# Altium PCB MCU_Board.PcbDoc (part 2 of 2)
Units mil, origin at the board's own origin, x right, y up, seen from the top; angles counter-clockwise.
Board outline 5411.85 x 3910 mil, 4 copper layers (Top Layer, Second Layer, Third Layer, Fouth Layer), stack 59.526 mil thick; 116 components, 143 nets, 703 pads, 913 vias.
Unrouted connection lines stored in the file: 4.
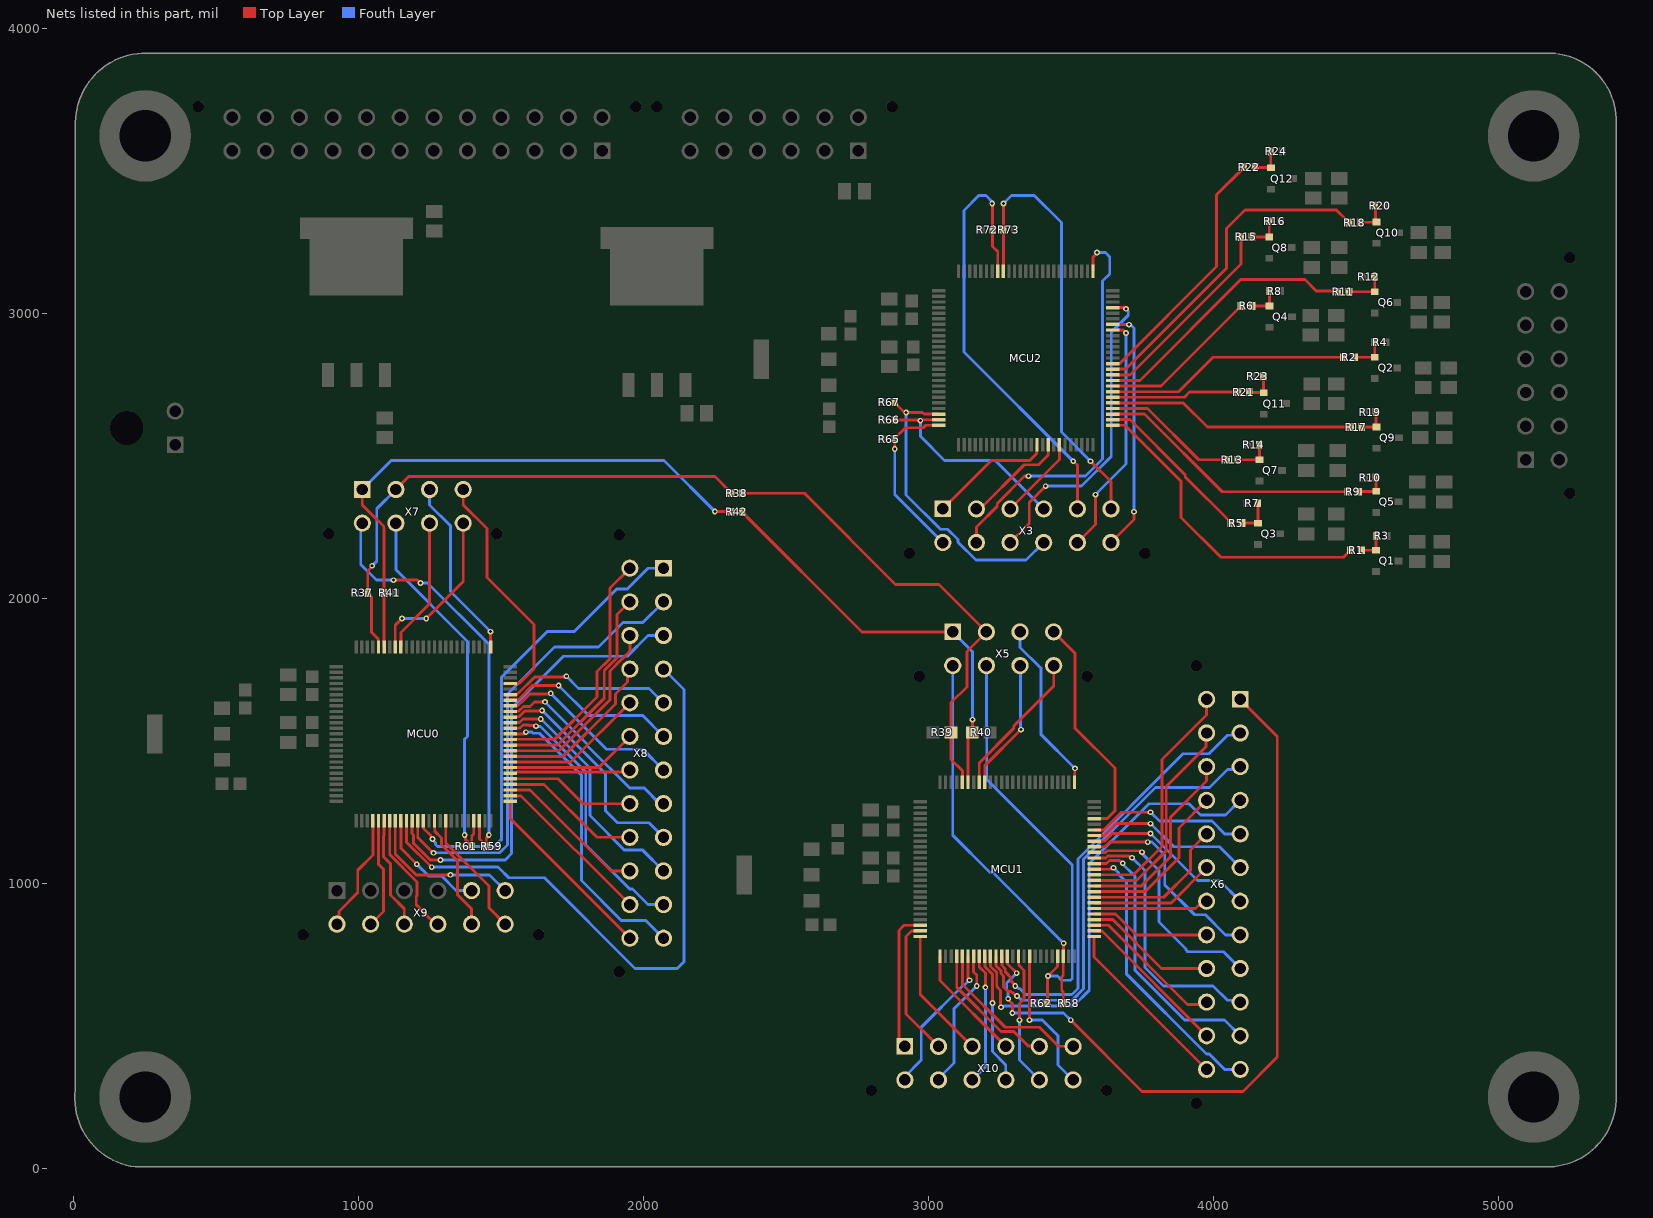
[diagram p4: the nets of this part, all layers, seen from the top]

## Via types
v1: diameter 20, hole 10, Top Layer to Fouth Layer, tented both sides, 913 vias

## Nets (pads, with @x,y where several pads share a name; then routed paths per layer and width w, separated by ;. In a path a pad name is that pad's centre, name@x,y a point inside that pad or via, vN(x,y) a via of type N, cw(c..) or ccw(c..) an arc to the next point about the centre after c; other vN are vias at no path point) (continued)
NetMCU0_29: MCU0.29 X9.P$7 | length 415.2
  Top Layer w10: X9.P$7@923.7,856.89 930.25,863.44 930.25,902.01 996.69,968.45 996.69,1046.34 1049.65,1099.3 MCU0.29@1049.65,1219.88
NetMCU0_30: MCU0.30 X9.P$8 | length 389
  Top Layer w10: X9.P$8@1041.81,856.89 1086.93,902.01 1086.93,1049.63 1069.33,1067.23 MCU0.30@1069.33,1219.88
NetMCU0_31: MCU0.31 X9.P$9 | length 394.2
  Top Layer w10: MCU0.31@1089.02,1219.88 1089.02,1168.77 1086.81,1166.57 1086.81,1093.88 1111.81,1068.88 1111.81,959.3 1159.92,911.19 X9.P$9@1159.92,856.89
NetMCU0_32: MCU0.32 X9.P$10 | length 440.6
  Top Layer w10: MCU0.32@1108.7,1219.88 1108.7,1101.9 1205.04,1005.56 1205.04,956.31 1201.81,953.08 1201.81,925 1269.92,856.89 X9.P$10@1278.04,856.89
NetMCU0_33: MCU0.33 X9.P$6 | length 555.7
  Top Layer w10: MCU0.33@1128.39,1219.88 1128.39,1103.43 1201.81,1030 1321.81,1030 v1(1322.01,1030.2)
  Fouth Layer w10: v1(1322.01,1030.2) 1322.21,1030 1459.26,1030 X9.P$6@1514.26,975
NetMCU0_34: MCU0.34 X9.P$5 | length 409.7
  Top Layer w10: MCU0.34@1148.07,1219.88 1148.07,1123.74 v1@1206.81,1065
  Fouth Layer w10: v1(1203.9,1067.38) 1246.24,1025.04 1291.81,1025.04 1341.85,975 X9.P$5@1396.15,975
NetMCU0_35: MCU0.35 X8.P$4 | length 2300
  Top Layer w10: MCU0.35@1167.76,1219.88 1167.76,1144.41 1254.9,1057.27 v1(1256.21,1057.27)
  Fouth Layer w10: v1(1256.21,1057.27) 1256.44,1057.5 1322.94,1057.5 1489.31,1057.5 1492.24,1054.57 1526.81,1020 1651.81,1020 1970.18,701.64 2118.45,701.64 2141.81,725 2141.81,1680.56 X8.P$4@2069.92,1752.45
NetMCU0_36: MCU0.36 X8.P$3 | length 1608.1
  Top Layer w10: MCU0.36@1187.44,1219.88 1187.44,1175.12 1192.13,1170.44 1192.13,1141.25 1251.11,1082.27 1286.58,1082.27 v1(1286.81,1082.5)
  Fouth Layer w10: v1(1286.81,1082.5) 1514.31,1082.5 1536.81,1105 1536.81,1615 1719.38,1797.57 1942.63,1797.57 2015.62,1870.56 X8.P$3@2069.92,1870.56
NetMCU0_37: MCU0.37 X8.P$2 | length 1619
  Top Layer w10: MCU0.37@1207.13,1219.88 1207.13,1161.61 1261.46,1107.27 v1(1262.77,1107.27)
  Fouth Layer w10: v1(1262.77,1107.27) 1276.46,1107.5 1494.31,1107.5 1521.81,1135 1521.81,1665 1686.81,1830 1841.81,1830 1927.49,1915.68 1996.93,1915.68 X8.P$2@2069.92,1988.67
NetMCU0_38: MCU0.38 X8.P$1 | length 1642.4
  Top Layer w10: MCU0.38@1226.81,1219.88 1227.72,1218.98 1227.72,1192.88 1252.71,1167.89 1252.71,1164.87 1258.83,1158.75 v1(1258.83,1156.04)
  Fouth Layer w10: v1(1258.83,1156.04) 1258.83,1153.33 1269.39,1142.78 1269.39,1137.07 1276.46,1130 1476.81,1130 1501.81,1155 1501.81,1725 1661.81,1885 1756.81,1885 1905.6,2033.79 1942.63,2033.79 2015.62,2106.78 X8.P$1@2069.92,2106.78
NetMCU0_40: MCU0.40 X9.P$11 | length 416.8
  Top Layer w10: MCU0.40@1266.18,1219.88 1267.09,1218.98 1267.09,1183.14 1290.55,1159.68 1290.55,1135.94 1347.01,1079.49 1347.01,960.33 1396.15,911.19 X9.P$11@1396.15,856.89
NetMCU0_42: MCU0.42 X9.P$12 | length 449.4
  Top Layer w10: MCU0.42@1305.55,1219.88 1305.55,1142.16 1456.81,990.9 1456.81,914.34 X9.P$12@1514.26,856.89
NetMCU0_47: MCU0.47 R61.2 X7.P$6 | length 1344.4
  Top Layer w10: v1(1371.81,1170) 1373.73,1168.09 1373.73,1155.06 R61.2@1396.81,1131.97 ; R61.2@1396.81,1130 R61.2@1396.81,1131.97 ; MCU0.47@1403.98,1219.88 1403.98,1174.06 1396.81,1166.89 R61.2@1396.81,1131.97
  Fouth Layer w10: X7.P$6@1130.58,2265 1130.58,2101.23 1381.81,1850 1381.81,1516.35 1371.81,1506.35 v1(1371.81,1170)
NetMCU0_48: MCU0.48 R59.1 X7.P$5 | length 1524.1
  Top Layer w10: v1@1122.67,2065 1205.95,2065 1215.95,2055 v1(1216.81,2055) ; MCU0.48@1423.66,1219.88 1423.66,1155.75 R59.1@1447.44,1131.97 ; R59.1@1447.44,1130 R59.1@1447.44,1131.97 ; v1(1456.81,1170) 1456.81,1168.15 1447.44,1158.78 R59.1@1447.44,1131.97
  Fouth Layer w10: X7.P$5@1012.47,2265 1006.81,2259.34 1006.81,2120 1061.81,2065 v1(1121.81,2065) ; v1(1216.81,2055) 1241.81,2055 1456.81,1840 v1(1456.81,1170)
NetMCU0_51: MCU0.51 X8.P$24 | length 655.1
  Top Layer w10: MCU0.51@1531.93,1288.78 1531.93,1227.44 X8.P$24@1951.81,807.56
NetMCU0_52: MCU0.52 X8.P$23 | length 578.4
  Top Layer w10: MCU0.52@1531.93,1308.46 1532.84,1307.56 1569.92,1307.56 X8.P$23@1951.81,925.67
NetMCU0_53: MCU0.53 X8.P$22 | length 537.7
  Top Layer w10: MCU0.53@1531.93,1328.15 1601.75,1328.15 1886.12,1043.78 X8.P$22@1951.81,1043.78
NetMCU0_54: MCU0.54 X8.P$21 | length 496.9
  Top Layer w10: MCU0.54@1531.93,1347.83 1650.96,1347.83 1836.9,1161.89 X8.P$21@1951.81,1161.89
NetMCU0_55: MCU0.55 X8.P$20 | length 456.1
  Top Layer w10: MCU0.55@1531.93,1367.52 1700.17,1367.52 1787.69,1280 X8.P$20@1951.81,1280
NetMCU0_56: MCU0.56 X8.P$19 | length 424.4
  Top Layer w10: MCU0.56@1531.93,1387.2 1549.65,1387.2 1553.43,1390.98 1944.69,1390.98 X8.P$19@1951.81,1398.11
NetMCU0_57: MCU0.57 X8.P$18 | length 465.2
  Top Layer w10: MCU0.57@1531.93,1406.89 1842.47,1406.89 X8.P$18@1951.81,1516.23
NetMCU0_58: MCU0.58 X8.P$17 | length 505.9
  Top Layer w10: MCU0.58@1531.93,1426.57 1744.05,1426.57 X8.P$17@1951.81,1634.34
NetMCU0_59: MCU0.59 X8.P$16 | length 589.2
  Top Layer w10: MCU0.59@1531.93,1446.26 1718.07,1446.26 1901.81,1630 1901.81,1665 1944.14,1707.33 1944.14,1744.78 X8.P$16@1951.81,1752.45
NetMCU0_60: MCU0.60 X8.P$15 | length 679
  Top Layer w10: MCU0.60@1531.93,1465.94 1702.76,1465.94 1881.81,1645 1881.81,1746.26 1924.31,1788.76 1925.03,1788.76 1951.81,1815.54 X8.P$15@1951.81,1870.56
NetMCU0_61: MCU0.61 X8.P$14 | length 773.9
  Top Layer w10: MCU0.61@1531.93,1485.63 1532.84,1486.54 1698.35,1486.54 1861.81,1650 1861.81,1747.5 1906.81,1792.5 1906.81,1866.92 ccw(c1896.81,1866.92) 1906.79,1867.54 cw(c1951.81,1870.56) 1906.79,1873.58 ccw(c1896.81,1874.2) 1906.81,1874.2 1906.81,1943.67 X8.P$14@1951.81,1988.67
NetMCU0_62: MCU0.62 X8.P$13 | length 866.3
  Top Layer w10: MCU0.62@1531.93,1505.32 1532.84,1506.22 1688.03,1506.22 1836.81,1655 1836.81,1743.71 1881.81,1788.71 1881.81,2036.78 X8.P$13@1951.81,2106.78
NetMCU0_63: MCU0.63 X8.P$12 | length 1057.1
  Top Layer w10: MCU0.63@1531.93,1525 1577.89,1525 1584.11,1531.22 v1(1586.81,1531.22)
  Fouth Layer w10: v1(1586.81,1531.22) 1608.12,1531.22 1611.96,1527.38 1634.43,1527.38 1781.81,1380 1781.81,1010 1921.81,870 2007.48,870 X8.P$12@2069.92,807.56
NetMCU0_64: MCU0.64 X8.P$11 | length 954.1
  Top Layer w10: MCU0.64@1531.93,1544.68 1564.92,1544.68 1576.46,1556.22 1597.17,1556.22 1599.1,1554.29 1620.4,1554.29 v1(1622.31,1552.38)
  Fouth Layer w10: v1(1622.31,1552.38) 1624.23,1550.47 1637.56,1550.47 1796.81,1391.21 1796.81,1134.97 1951.6,980.19 1961.1,980.19 2015.62,925.67 X8.P$11@2069.92,925.67
NetMCU0_65: MCU0.65 X8.P$10 | length 858.3
  Top Layer w10: MCU0.65@1531.93,1564.37 1532.84,1565.28 1564.3,1565.28 1576.4,1577.38 v1(1638.9,1577.38)
  Fouth Layer w10: v1@1641.81,1575 1811.81,1405 1811.81,1238.08 1933.12,1116.77 1996.93,1116.77 X8.P$10@2069.92,1043.78
NetMCU0_66: MCU0.66 X8.P$9 | length 810.2
  Top Layer w10: MCU0.66@1531.93,1584.06 1532.84,1584.96 1562.77,1584.96 1582.81,1605 v1@1646.81,1605
  Fouth Layer w10: v1(1643.9,1607.38) 1644.25,1607.38 1866.81,1384.82 1866.81,1255 1908.56,1213.25 2018.56,1213.25 X8.P$9@2069.92,1161.89
NetMCU0_67: MCU0.67 X8.P$8 | length 706.9
  Top Layer w10: MCU0.67@1531.93,1603.74 1532.84,1604.65 1561.24,1604.65 1578.17,1621.57 1601.43,1621.57 1617.24,1637.38 v1(1653.9,1637.38) 1654.43,1637.38 v1@1656.81,1635
  Fouth Layer w10: v1(1653.9,1637.38) 1803.7,1487.57 1803.7,1482.41 1951.6,1334.52 2002.3,1334.52 2056.81,1280 X8.P$8@2069.92,1280
NetMCU0_68: MCU0.68 X8.P$7 | length 669.7
  Top Layer w10: MCU0.68@1531.93,1623.43 1532.84,1624.33 1559.71,1624.33 1571.96,1636.57 1572.12,1636.57 1600.55,1665 v1@1676.81,1665
  Fouth Layer w10: v1(1673.9,1667.38) 1870.16,1471.11 1996.92,1471.11 X8.P$7@2069.92,1398.11
NetMCU0_69: MCU0.69 X8.P$6 | length 633.5
  Top Layer w10: MCU0.69@1531.93,1643.11 1532.84,1644.02 1558.19,1644.02 1565.75,1651.57 1565.91,1651.57 1609.33,1695 v1(1701.81,1695)
  Fouth Layer w10: v1(1701.81,1695) 1807.59,1589.22 1996.93,1589.22 X8.P$6@2069.92,1516.23
NetMCU0_70: MCU0.70 X8.P$5 | length 605.2
  Top Layer w10: MCU0.70@1531.93,1662.8 1532.84,1663.7 1555.51,1663.7 1558.39,1666.57 1559.69,1666.57 1618.12,1725 v1@1731.81,1725
  Fouth Layer w10: v1(1728.9,1727.38) 1771.57,1684.71 2019.55,1684.71 X8.P$5@2069.92,1634.34
NetMCU0_72: MCU0.72 X7.P$4 | length 836.9
  Top Layer w10: X7.P$4@1366.81,2383.11 1366.81,2328.81 1449.84,2245.78 1449.84,2074.23 1615,1909.07 1615,1753.19 1564.88,1703.07 1532.84,1703.07 MCU0.72@1531.93,1702.17
NetMCU0_76: MCU0.76 X7.P$3 | length 641.8
  Top Layer w10: v1(1462.4,1884.05) 1462.72,1883.74 1462.72,1830.43 MCU0.76@1463.03,1830.12
  Fouth Layer w10: X7.P$3@1248.7,2383.11 1248.7,2328.81 1321.69,2255.82 1321.69,2024.76 v1(1462.4,1884.05)
NetMCU0_92: MCU0.92 X7.P$7 | length 476.6
  Top Layer w10: MCU0.92@1148.07,1830.12 1148.07,1881.62 1248.7,1982.25 X7.P$7@1248.7,2265
NetMCU0_93: MCU0.93 X7.P$8 | length 583.4
  Top Layer w10: MCU0.93@1128.39,1830.12 1128.39,1906.57 v1(1151.81,1930) ; v1(1236.81,1930) 1366.81,2060 X7.P$8@1366.81,2265
  Fouth Layer w10: v1(1151.81,1930) v1(1236.81,1930)
NetMCU1_23: MCU1.23 X10.P$1 | length 497.8
  Top Layer w10: X10.P$1@2917.47,428.11 2896.81,448.77 2896.81,835 2914.96,853.15 MCU1.23@2971.69,853.15
NetMCU1_24: MCU1.24 X10.P$2 | length 491
  Top Layer w10: MCU1.24@2971.69,833.46 2970.79,832.56 2940.23,832.56 2921.81,814.14 2921.81,541.88 X10.P$2@3035.58,428.11
NetMCU1_25: MCU1.25 X10.P$3 | length 461.1
  Top Layer w10: MCU1.25@2971.69,813.78 2971.69,610.11 X10.P$3@3153.69,428.11
NetMCU1_26: MCU1.26 X10.P$4 | length 412.5
  Top Layer w10: MCU1.26@3040.59,744.88 3040.59,659.33 X10.P$4@3271.81,428.11
NetMCU1_29: MCU1.29 X10.P$5 | length 485.6
  Top Layer w10: MCU1.29@3099.65,744.88 3099.65,635.35 3255,480 3300,480 3350.66,429.34 3388.69,429.34 X10.P$5@3389.92,428.11
NetMCU1_30: MCU1.30 X10.P$6 | length 578
  Top Layer w10: MCU1.30@3119.33,744.88 3119.33,645.67 3270,495 3390,495 3456.89,428.11 X10.P$6@3508.03,428.11
NetMCU1_31: MCU1.31 X10.P$7 | length 533.5
  Top Layer w10: MCU1.31@3139.02,744.88 3139.02,668.2 3144.33,662.88 v1(3144.33,660.18)
  Fouth Layer w10: X10.P$7@2917.47,310 2917.47,322.47 2975,380 2975,495 3121.04,641.04 3125.2,641.04 v1(3144.33,660.18)
NetMCU1_32: MCU1.32 X10.P$8 | length 495.2
  Top Layer w10: MCU1.32@3158.7,744.88 3158.7,689.23 3170,677.93 v1(3170,640)
  Fouth Layer w10: X10.P$8@3035.58,310 3035.58,315.58 3090,370 3090,560 v1(3170,640)
NetMCU1_33: MCU1.33 X10.P$9 | length 463
  Top Layer w10: MCU1.33@3178.39,744.88 3178.39,706.61 3200,685 v1(3200,635)
  Fouth Layer w10: X10.P$9@3153.69,310 3200,356.31 v1(3200,635)
NetMCU1_34: MCU1.34 X10.P$10 | length 465.4
  Top Layer w10: MCU1.34@3198.07,744.88 3198.98,743.98 3198.98,707.24 3225,681.21 v1(3225,580)
  Fouth Layer w10: v1(3225,580) 3225,409.45 3271.81,362.64 X10.P$10@3271.81,310
NetMCU1_35: MCU1.35 X6.P$4 | length 1630.3
  Top Layer w10: MCU1.35@3217.76,744.88 3218.66,743.98 3218.66,708.76 3240,687.43 3240,637.71 3253.09,624.62 3253.09,566.91 v1(3255,565)
  Fouth Layer w10: v1(3255,565) 3257.71,565 3262.71,570 3510,570 3565,625 3565,1070.36 3774.64,1280 3915,1280 3955,1240 4043.03,1240 X6.P$4@4094.92,1291.89
NetMCU1_36: MCU1.36 X6.P$3 | length 1576
  Top Layer w10: MCU1.36@3237.44,744.88 3237.44,711.2 3255,693.64 3255,683.43 3263.43,675 3263.43,636.57 3280,620 3290.36,620 3295.18,615.17 3298.1,615.17 3308.27,605 v1(3310.98,605)
  Fouth Layer w10: v1(3310.98,605) 3312.71,605 3327.71,590 3505,590 3545,630 3545,1085 3797.01,1337.01 3987.01,1337.01 4050.39,1400.39 4085.31,1400.39 X6.P$3@4094.92,1410
NetMCU1_37: MCU1.37 X6.P$2 | length 1573.7
  Top Layer w10: MCU1.37@3257.13,744.88 3258.03,743.98 3258.03,711.82 3270,699.85 3270,689.64 3291.11,668.54 3291.11,656.6 3305.12,642.58 v1(3305.12,640.17)
  Fouth Layer w10: v1(3305.12,640.17) 3307.83,640.17 3318,630 3321.34,630 3341.34,610 3503.79,610 3525,631.21 3525,1086.21 3893.91,1455.12 3984.88,1455.12 4049.8,1520.04 4086.85,1520.04 X6.P$2@4094.92,1528.11
NetMCU1_38: MCU1.38 X6.P$1 | length 2640.1
  Top Layer w10: MCU1.38@3276.81,744.88 3277.72,743.98 3277.72,717.28 v1(3310,685) ; v1(3280,595) 3280,592.29 3295,577.29 v1(3295,545) ; v1(3500,520) 3750,270 4105,270 4225,390 4225,1516.14 X6.P$1@4094.92,1646.22
  Fouth Layer w10: v1(3280,595) 3280,621.35 3275,626.35 3275,650 v1(3310,685) ; v1(3295,545) 3475,545 v1(3500,520)
NetMCU1_40: MCU1.40 X10.P$11 | length 478.7
  Top Layer w10: MCU1.40@3316.18,744.88 3317.09,743.98 3317.09,713.27 3335.98,694.37 3335.98,594.64 3320,578.66 v1(3320,520)
  Fouth Layer w10: v1(3320,520) 3320,379.92 X10.P$11@3389.92,310
NetMCU1_42: MCU1.42 X10.P$12 | length 524.1
  Top Layer w10: v1(3355,520) MCU1.42@3355,744.33
  Fouth Layer w10: v1(3355,520) 3400,520 3455,465 3455,363.03 X10.P$12@3508.03,310
NetMCU1_47: MCU1.47 R62.2 X5.P$6 | length 1498
  Top Layer w10: R62.2@3416.5,580 3418.25,581.75 3418.25,673.25 3453.07,708.07 3453.07,743.98 MCU1.47@3453.98,744.88
  Fouth Layer w10: X5.P$6@3203.69,1765 3203.69,1554.07 3205,1552.77 3205,1365.05 3505,1065.05 3505,665.86 3499.14,660 3468.42,660 3453.42,675 v1(3420,675)
NetMCU1_48: MCU1.48 R58.1 X5.P$5 | length 1357.1
  Top Layer w10: R58.1@3473.66,580 3473.66,619.33 3468.35,624.64 3468.35,671.97 3473.66,677.28 MCU1.48@3473.66,744.88 3474.33,745.55 3474.33,789.33 v1(3475,790)
  Fouth Layer w10: X5.P$5@3085.58,1765 3085.58,1169.42 3216.83,1038.17 3226.83,1038.17 v1(3475,790)
NetMCU1_51: MCU1.51 X6.P$24 | length 630.3
  Top Layer w10: MCU1.51@3581.93,813.78 3581.93,741.88 X6.P$24@3976.81,347
NetMCU1_52: MCU1.52 X6.P$23 | length 547.5
  Top Layer w10: MCU1.52@3581.93,833.46 3582.84,832.56 3609.36,832.56 X6.P$23@3976.81,465.11
NetMCU1_53: MCU1.53 X6.P$22 | length 513.5
  Top Layer w10: MCU1.53@3581.93,853.15 3631.85,853.15 3910,575 3968.59,575 X6.P$22@3976.81,583.22
NetMCU1_54: MCU1.54 X6.P$21 | length 465.9
  Top Layer w10: MCU1.54@3581.93,872.83 3647.17,872.83 3818.67,701.33 X6.P$21@3976.81,701.33
NetMCU1_55: MCU1.55 X6.P$20 | length 425.2
  Top Layer w10: MCU1.55@3581.93,892.52 3657.48,892.52 3730.56,819.44 X6.P$20@3976.81,819.44
NetMCU1_56: MCU1.56 X6.P$19 | length 405.4
  Top Layer w10: MCU1.56@3581.93,912.2 3938.35,912.2 3963.69,937.55 X6.P$19@3976.81,937.55
NetMCU1_57: MCU1.57 X6.P$18 | length 446.2
  Top Layer w10: MCU1.57@3581.93,931.89 3853.03,931.89 X6.P$18@3976.81,1055.67
NetMCU1_58: MCU1.58 X6.P$17 | length 529.1
  Top Layer w10: MCU1.58@3581.93,951.57 3826.57,951.57 3920,1045 3920,1116.97 X6.P$17@3976.81,1173.78
NetMCU1_59: MCU1.59 X6.P$16 | length 593.1
  Top Layer w10: MCU1.59@3581.93,971.26 3761.26,971.26 3880,1090 3880,1195.08 X6.P$16@3976.81,1291.89
  Fouth Layer w10: X6.P$16@3975,1295 3976.81,1293.19 X6.P$16@3976.81,1291.89
NetMCU1_60: MCU1.60 X6.P$15 | length 679.4
  Top Layer w10: MCU1.60@3581.93,990.94 3747.16,990.94 3850,1093.79 3850,1232.3 3976.81,1359.11 X6.P$15@3976.81,1410
NetMCU1_61: MCU1.61 X6.P$14 | length 768.2
  Top Layer w10: MCU1.61@3581.93,1010.63 3730.63,1010.63 3835,1115 3835,1340 3975,1480 3975,1526.3 X6.P$14@3976.81,1528.11
NetMCU1_62: MCU1.62 X6.P$13 | length 860.5
  Top Layer w10: MCU1.62@3581.93,1030.32 3720.32,1030.32 3820,1130 3820,1435.11 3976.81,1591.92 X6.P$13@3976.81,1646.22
NetMCU1_63: MCU1.63 X6.P$12 | length 1000.3
  Top Layer w10: MCU1.63@3581.93,1050 3641.98,1050 3647.29,1055.32 v1(3650,1055.32)
  Fouth Layer w10: v1(3650,1055.32) 3668.56,1036.76 3668.56,1031.44 3695,1005 3695,683.11 3976.6,401.52 3986.1,401.52 4040.62,347 X6.P$12@4094.92,347
NetMCU1_64: MCU1.64 X6.P$11 | length 967.7
  Top Layer w10: MCU1.64@3581.93,1069.68 3625.14,1069.68 3635.77,1080.32 3670.19,1080.32 3679.74,1070.77 v1(3682.45,1070.77)
  Fouth Layer w10: v1@3680,1070 3725,1025 3725,695 3900,520 4040.03,520 X6.P$11@4094.92,465.11
NetMCU1_65: MCU1.65 X6.P$10 | length 927.1
  Top Layer w10: MCU1.65@3581.93,1089.37 3623.61,1089.37 3630.01,1095.77 3706.53,1095.77 3712.29,1090 v1(3715,1090)
  Fouth Layer w10: v1(3715,1090) 3760,1045 3760,705 3825,640 3999.77,640 4049.8,589.97 4088.17,589.97 X6.P$10@4094.92,583.22
NetMCU1_66: MCU1.66 X6.P$9 | length 796.1
  Top Layer w10: MCU1.66@3581.93,1109.06 3622.08,1109.06 3628.03,1115 3742.29,1115 3747.29,1110 v1(3750,1110)
  Fouth Layer w10: v1@3747.5,1107.5 3810,1045 3810,865 3905,770 3905,765.86 3910.86,760 4036.25,760 X6.P$9@4094.92,701.33
NetMCU1_67: MCU1.67 X6.P$8 | length 716.1
  Top Layer w10: MCU1.67@3581.93,1128.74 3620.55,1128.74 3636.81,1145 v1(3770,1145)
  Fouth Layer w10: v1(3770,1145) 3785,1145 3830,1100 3830,995 3935,890 3972.88,890 4043.44,819.44 X6.P$8@4094.92,819.44
NetMCU1_68: MCU1.68 X6.P$7 | length 622.4
  Top Layer w10: MCU1.68@3581.93,1148.43 3619.03,1148.43 3645.6,1175 v1(3780,1175)
  Fouth Layer w10: v1(3780,1175) 3944.45,1010.55 4021.92,1010.55 X6.P$7@4094.92,937.55
NetMCU1_69: MCU1.69 X6.P$6 | length 594.3
  Top Layer w10: MCU1.69@3581.93,1168.11 3617.5,1168.11 3659.39,1210 v1(3780,1210)
  Fouth Layer w10: v1(3780,1210) 3780.36,1210 3861.7,1128.66 4021.93,1128.66 X6.P$6@4094.92,1055.67
NetMCU1_70: MCU1.70 X6.P$5 | length 570.3
  Top Layer w10: MCU1.70@3581.93,1187.8 3615.97,1187.8 3678.17,1250 v1(3780,1250)
  Fouth Layer w10: v1(3780,1250) 3811.1,1218.9 3995.5,1218.9 4040.62,1173.78 X6.P$5@4094.92,1173.78
NetMCU1_72: MCU1.72 X5.P$4 | length 801.8
  Top Layer w10: X5.P$4@3439.92,1883.11 3515,1808.03 3515,1545 3655,1405 3655,1255 3628.07,1228.07 3582.84,1228.07 MCU1.72@3581.93,1227.17
NetMCU1_76: MCU1.76 X5.P$3 | length 608.5
  Top Layer w10: MCU1.76@3513.03,1355.12 3513.8,1355.89 3513.8,1403.21 v1(3514.58,1403.98)
  Fouth Layer w10: X5.P$3@3321.81,1883.11 3321.81,1828.81 3394.8,1755.82 3394.8,1523.75 v1(3514.58,1403.98)
NetMCU1_92: MCU1.92 X5.P$7 | length 463.9
  Top Layer w10: MCU1.92@3198.07,1355.12 3197.92,1355.27 3197.92,1412.92 v1(3325,1540)
  Fouth Layer w10: X5.P$7@3321.81,1765 3323.41,1763.41 3323.41,1541.59 v1(3325,1540)
NetMCU1_93: MCU1.93 X5.P$8 | length 518.2
  Top Layer w10: MCU1.93@3178.39,1355.12 3178.39,1423.03 3300,1544.64 3300,1552.97 3439.92,1692.89 X5.P$8@3439.92,1765
NetMCU2_40: MCU2.40 X3.P$1 | length 440.7
  Top Layer w10: X3.P$1@3050.59,2315 3220.59,2485 3355.79,2485 3380.46,2509.67 3380.46,2538.72 MCU2.40@3381.3,2539.57
NetMCU2_42: MCU2.42 X3.P$2 | length 365.9
  Top Layer w10: X3.P$2@3168.7,2315 3181.81,2315 3336.81,2470 3386.81,2470 3420.67,2503.86 MCU2.42@3420.67,2539.57
NetMCU2_44: MCU2.44 X3.P$3 | length 296.3
  Top Layer w10: X3.P$3@3286.81,2315 3460.04,2488.23 MCU2.44@3460.04,2539.57
NetMCU2_51: MCU2.51 R1.1 | length 1113
  Top Layer w10: MCU2.51@3647.05,2608.46 3690.38,2608.46 3886.81,2412.03 3886.81,2285 4026.81,2145 4457.13,2145 4473.35,2161.22 4475.32,2161.22 4482.13,2168.03 R1.1@4482.13,2170
NetMCU2_52: MCU2.52 R5.1 | length 570.8
  Top Layer w10: MCU2.52@3647.05,2628.46 3707.49,2628.46 3901.81,2434.14 3901.81,2427.28 4062.13,2266.97 R5.1@4062.13,2265
NetMCU2_53: MCU2.53 R9.1 | length 938.1
  Top Layer w10: MCU2.53@3647.05,2647.83 3758.98,2647.83 4031.81,2375 R9.1@4472.13,2375
NetMCU2_54: MCU2.54 R13.1 | length 474.7
  Top Layer w10: MCU2.54@3647.05,2667.52 3769.29,2667.52 3949.41,2487.4 R13.1@4047.13,2487.4
NetMCU2_55: MCU2.55 R17.1 | length 869.9
  Top Layer w10: MCU2.55@3647.05,2687.2 3894.61,2687.2 3979.41,2602.4 R17.1@4481.81,2602.4
NetMCU2_56: MCU2.56 R21.1 | length 447.6
  Top Layer w10: MCU2.56@3647.05,2706.89 3898.7,2706.89 3916.81,2725 R21.1@4087.13,2725
NetMCU2_57: MCU2.57 R2.1 | length 860.4
  Top Layer w10: MCU2.57@3647.05,2726.57 3878.39,2726.57 3999.21,2847.4 R2.1@4457.44,2847.4
NetMCU2_58: MCU2.58 R6.1 | length 568
  Top Layer w10: MCU2.58@3647.05,2746.26 3816.3,2746.26 4088.66,3018.62 4090.63,3018.62 4097.44,3025.43 R6.1@4097.44,3027.4
NetMCU2_59: MCU2.59 R11.1 | length 954.7
  Top Layer w10: MCU2.59@3647.05,2765.94 3742.76,2765.94 4096.81,3120 4321.81,3120 4361.81,3080 4434.84,3080 R11.1@4437.44,3077.4
NetMCU2_60: MCU2.60 R15.1 | length 706.2
  Top Layer w10: MCU2.60@3647.05,2785.63 3707.44,2785.63 4097.13,3175.32 R15.1@4097.13,3270
NetMCU2_61: MCU2.61 R18.1 | length 1163.7
  Top Layer w10: MCU2.61@3647.05,2805.31 3647.95,2806.22 3693.03,2806.22 4046.81,3160 4046.81,3300 4111.81,3365 4432.13,3365 4468.35,3328.78 4470.32,3328.78 4477.13,3321.97 R18.1@4477.13,3320
NetMCU2_62: MCU2.62 R22.1 | length 894.6
  Top Layer w10: MCU2.62@3647.05,2825 3647.95,2825.91 3671.94,2825.91 4011.81,3165.78 4011.81,3417.72 4107.13,3513.03 R22.1@4107.13,3515
NetMCU2_68: MCU2.68 X3.P$11 | length 861.5
  Top Layer w10: X3.P$11@3523.04,2196.89 3586.81,2260.66 v1(3586.81,2365) ; MCU2.68@3647.05,2943.11 3683.7,2943.11 v1@3696.81,2930
  Fouth Layer w10: v1(3586.81,2365) 3693.9,2472.08 v1(3693.9,2932.38)
NetMCU2_69: MCU2.69 X3.P$12 | length 858.1
  Top Layer w10: X3.P$12@3641.15,2196.89 3721.81,2277.55 v1(3721.81,2305) ; MCU2.69@3647.05,2962.8 3647.42,2962.42 3703.85,2962.42 v1(3704.22,2962.05)
  Fouth Layer w10: v1@3711.81,2960 3721.81,2950 v1(3721.81,2305)
NetMCU2_72: MCU2.72 X3.P$9 | length 1107.7
  Top Layer w10: X3.P$9@3286.81,2196.89 3354.12,2264.2 3354.12,2337.31 v1(3411.81,2395) ; MCU2.72@3647.05,3021.85 3686.72,3021.85 3691.19,3017.38 v1(3693.9,3017.38)
  Fouth Layer w10: v1(3411.81,2395) 3538.09,2395 3641.81,2498.73 3641.81,2935 3701.81,2995 3701.81,3010
NetMCU2_76: MCU2.76 X3.P$8 | length 1444.4
  Top Layer w10: X3.P$8@3168.7,2196.89 3168.7,2251.19 3241.69,2324.18 3241.69,2333.69 3338,2430 v1(3351.81,2430) ; MCU2.76@3578.15,3149.8 3578.15,3198.63 3591.81,3212.29 v1(3591.81,3215)
  Fouth Layer w10: v1(3351.81,2430) 3551.87,2430 3611.81,2489.94 3611.81,3115 3636.81,3140 3636.81,3200 3621.81,3215 v1(3591.81,3215)
NetMCU2_92: MCU2.92 R73.1 X3.P$6 | length 1565.2
  Top Layer w10: MCU2.92@3263.19,3149.8 3263.54,3150.16 3263.54,3387.03 v1(3263.9,3387.38) ; v1@3571.81,2480 3641.15,2410.66 X3.P$6@3641.15,2315
  Fouth Layer w10: v1(3263.9,3387.38) 3291.52,3415 3371.81,3415 3466.81,3320 3466.81,2584.46 v1(3568.9,2482.38)
NetMCU2_93: MCU2.93 R72.2 X3.P$5 | length 1593.8
  Top Layer w10: v1(3223.9,3387.38) 3225.04,3386.24 3225.04,3236.77 3243.51,3218.31 MCU2.93@3243.51,3149.8 ; v1@3511.81,2480 3523.04,2468.77 X3.P$5@3523.04,2315
  Fouth Layer w10: v1@3226.81,3385 3226.81,3390 3201.81,3415 3176.81,3415 3125,3363.19 3125,2866.27 v1(3508.9,2482.38)
NetQ1_1: Q1.1 R1.2 R3.1 | length 100.5
  Top Layer w10: R1.2@4521.5,2170 4521.6,2169.9 4571.71,2169.9 4571.97,2170.16 4571.97,2219.84 R3.1@4572.13,2220
NetQ2_1: Q2.1 R2.2 R4.1 | length 123.4
  Top Layer w10: R2.2@4496.81,2847.4 Q2.1@4567.44,2847.4 4567.28,2847.56 4567.28,2899.84 R4.1@4567.13,2900
NetQ3_1: Q3.1 R5.2 R7.1 | length 125.6
  Top Layer w10: R5.2@4101.5,2265 4101.6,2264.9 4156.71,2264.9 Q3.1@4156.81,2264.8 R7.1@4156.81,2335
NetQ4_1: Q4.1 R6.2 R8.1 | length 113.4
  Top Layer w10: R6.2@4136.81,3027.4 Q4.1@4197.44,3027.4 4197.28,3027.56 4197.28,3079.84 R8.1@4197.13,3080
NetQ5_1: Q5.1 R9.2 R10.1 | length 109.5
  Top Layer w10: R9.2@4511.5,2375 4512.7,2376.2 4571.24,2376.2 4572.13,2377.09 4572.13,2424.69 R10.1@4571.81,2425
NetQ6_1: Q6.1 R11.2 R12.1 | length 143.6
  Top Layer w10: R11.2@4476.81,3077.4 Q6.1@4567.44,3077.4 4566.97,3077.87 4566.97,3129.53 R12.1@4566.5,3130
NetQ7_1: Q7.1 R13.2 R14.1 | length 128.8
  Top Layer w10: R13.2@4086.5,2487.4 Q7.1@4162.44,2487.4 4162.13,2487.72 4162.13,2539.69 R14.1@4161.81,2540
NetQ8_1: Q8.1 R15.2 R16.1 | length 115.4
  Top Layer w10: R15.2@4136.5,3270 Q8.1@4196.81,3270 4196.97,3270.16 4196.97,3324.84 R16.1@4197.13,3325
NetQ9_1: Q9.1 R17.2 R19.1 | length 105.3
  Top Layer w10: R17.2@4521.18,2602.4 Q9.1@4573.07,2602.4 4572.13,2603.35 4572.13,2654.06 R19.1@4571.18,2655
NetQ10_1: Q10.1 R18.2 R20.1 | length 117.6
  Top Layer w10: R18.2@4516.5,3320 4517.7,3321.2 4571.87,3321.2 Q10.1@4573.07,3322.4 4570.1,3325.37 4570.1,3377.03 R20.1@4567.13,3380
NetQ11_1: Q11.1 R21.2 R23.1 | length 109.3
  Top Layer w10: R21.2@4126.5,2725 4127.8,2723.7 4176.14,2723.7 Q11.1@4176.97,2722.87 ; R23.1@4176.5,2780 4176.97,2779.53 Q11.1@4176.97,2722.87 ; Q11.1@4177.44,2722.4 Q11.1@4176.97,2722.87
NetQ12_1: Q12.1 R22.2 R24.1 | length 114.5
  Top Layer w10: R22.2@4146.5,3515 4147.8,3513.7 4201.14,3513.7 Q12.1@4202.28,3512.56 ; R24.1@4202.13,3570 4202.28,3569.84 Q12.1@4202.28,3512.56 ; Q12.1@4202.44,3512.4 Q12.1@4202.28,3512.56
SCL0: MCU0.95 R41.2 R42.1 X7.P$1 | length 1999.4
  Top Layer w10: X7.P$1@1012.47,2383.11 1012.47,2328.81 1057.56,2283.72 1086.68,2254.61 ccw(c1130.58,2265) 1089.02,2247.45 R41.2@1089.02,2020 MCU0.95@1089.02,1830.12 ; v1(2250.41,2305.63) 2250.73,2305.31 2306.81,2305.31 R42.1@2307.13,2305
  Fouth Layer w10: X7.P$1@1012.47,2383.11 1114.36,2485 2071.58,2485 v1@2253.33,2303.25
SCL1: MCU1.95 R40.1 R42.2 X5.P$1 | length 1478.4
  Top Layer w10: R42.2@2346.5,2305 2346.5,2303.03 2766.42,1883.11 X5.P$1@3085.58,1883.11 ; MCU1.95@3139.02,1355.12 3139.02,1515 3155,1530.98 v1(3155,1575)
  Fouth Layer w10: X5.P$1@3085.58,1883.11 3155,1813.69 v1(3155,1575)
SDA0: MCU0.96 R37.2 R38.1 X7.P$2 | length 1830.7
  Top Layer w10: v1(1046.99,2115.18) 1046.99,2112.47 1031.5,2096.98 1031.5,2018.03 1038.31,2011.22 1039.14,2011.22 1045,2005.36 1045,1881.81 1068.43,1858.39 1068.43,1831.02 MCU0.96@1069.33,1830.12 ; X7.P$2@1130.58,2383.11 1175.7,2428.23 2250.87,2428.23 2307.13,2371.97 R38.1@2307.13,2370
  Fouth Layer w10: v1(1046.99,2115.18) 1063.26,2131.44 1063.26,2315.78 X7.P$2@1130.58,2383.11
SDA1: MCU1.96 R38.2 R39.2 X5.P$2 | length 1654.6
  Top Layer w10: R38.2@2346.5,2370 2565,2370 2885,2050 3036.8,2050 X5.P$2@3203.69,1883.11 3135,1814.42 3135,1690 3079.8,1634.8 R39.2@3079.8,1530 3079.8,1435.2 3119.33,1395.67 MCU1.96@3119.33,1355.12
Therm0: MCU2.23 R67.1 X3.P$10 | length 1076
  Top Layer w10: R67.1@2881.5,2690 2881.5,2688.03 2914.47,2655.06 2919.9,2655.06 v1(2921.81,2653.15) ; v1@2919.1,2650.43 v1(2921.81,2653.15) ; MCU2.23@3036.81,2647.83 2984.33,2647.83 2979.02,2653.15 v1(2921.81,2653.15)
  Fouth Layer w10: v1(2921.81,2653.15) 2921.81,2364.24 3042.4,2243.65 3067.64,2243.65 3103.62,2207.67 3103.62,2198.16 3166.78,2135 3343.04,2135 X3.P$10@3404.93,2196.89
Therm1: MCU2.24 R66.1 X3.P$4 | length 751.4
  Top Layer w10: R66.1@2881.81,2628.15 2883.39,2626.57 2970.24,2626.57 v1(2971.81,2625) 2974.52,2625 2977.67,2628.15 MCU2.24@3036.81,2628.15
  Fouth Layer w10: v1(2971.81,2625) 2971.81,2570 3056.81,2485 3234.93,2485 X3.P$4@3404.93,2315
Therm2: MCU2.25 R65.1 X3.P$7 | length 609.7
  Top Layer w10: v1(2881.81,2525) 2881.65,2525.16 2881.65,2559.84 R65.1@2881.5,2560 2881.5,2561.97 2919.53,2600 2982.17,2600 2990.63,2608.46 MCU2.25@3036.81,2608.46
  Fouth Layer w10: v1(2881.81,2525) 2881.81,2365.67 X3.P$7@3050.59,2196.89
pads on no net: MCU0.1 MCU0.2 MCU0.3 MCU0.4 MCU0.5 MCU0.7 MCU0.8 MCU0.9 MCU0.12 MCU0.13 MCU0.14 MCU0.15 MCU0.16 MCU0.17 MCU0.18 MCU0.39 MCU0.41 MCU0.43 MCU0.44 MCU0.45 MCU0.46 MCU0.71 MCU0.73 MCU0.77 MCU0.78 MCU0.79 MCU0.80 MCU0.81 MCU0.82 MCU0.83 MCU0.84 MCU0.85 MCU0.86 MCU0.87 MCU0.88 MCU0.89 MCU0.90 MCU0.91 MCU0.94 MCU0.97 MCU0.98 MCU1.1 MCU1.2 MCU1.3 MCU1.4 MCU1.5 MCU1.7 MCU1.8 MCU1.9 MCU1.12 MCU1.13 MCU1.14 MCU1.15 MCU1.16 MCU1.17 MCU1.18 MCU1.39 MCU1.41 MCU1.43 MCU1.44 MCU1.45 MCU1.46 MCU1.71 MCU1.73 MCU1.77 MCU1.78 MCU1.79 MCU1.80 MCU1.81 MCU1.82 MCU1.83 MCU1.84 MCU1.85 MCU1.86 MCU1.87 MCU1.88 MCU1.89 MCU1.90 MCU1.91 MCU1.94 MCU1.97 MCU1.98 MCU2.1 MCU2.2 MCU2.3 MCU2.4 MCU2.5 MCU2.7 MCU2.8 MCU2.9 MCU2.12 MCU2.13 MCU2.14 MCU2.15 MCU2.16 MCU2.17 MCU2.18 MCU2.26 MCU2.29 MCU2.30 MCU2.31 MCU2.32 MCU2.33 MCU2.34 MCU2.35 MCU2.36 MCU2.37 MCU2.38 MCU2.39 MCU2.41 MCU2.43 MCU2.45 MCU2.46 MCU2.47 MCU2.48 MCU2.63 MCU2.64 MCU2.65 MCU2.66 MCU2.67 MCU2.70 MCU2.71 MCU2.73 MCU2.77 MCU2.78 MCU2.79 MCU2.80 MCU2.81 MCU2.82 MCU2.83 MCU2.84 MCU2.85 MCU2.86 MCU2.87 MCU2.88 MCU2.89 MCU2.90 MCU2.91 MCU2.94 MCU2.95 MCU2.96 MCU2.97 MCU2.98 X1.1 X2.1 X3.1 X4.1 X5.1 X6.1 X7.1 X8.1 X9.1 X10.1 X11.1

## Polygon pours and split planes (outlines as drawn)
5V_Main on Top Layer "5V_MAIN_L01_P011" (solid, pour order 11): 825,3260 825,3060 960,3060 965,3055 965,2730 1010,2730 1015,2735 1015,3060 1020,3065 1160,3065 1155,3070 1155,3260
5V_Main on Top Layer "5V_MAIN_L01_P006" (solid, pour order 6): 490,3625 1925,3625 1920,3620 1920,3470 1435,3470 1280,3315 1195,3315 1195,3255 1160,3255 1160,3055 825,3055 825,3250 815,3260 790,3260 790,3340 655,3475 490,3475 490,3615
3.3V_Main on Top Layer "3.3V_MAIN_L01_P008" (solid, pour order 8): 1840,3305 1840,3225 1880,3225 1880,3025 2215,3025 2215,3225 2565,3225 2745,3405 2745,3465 2805,3525 2805,3615 2115,3615 1840,3340 1840,3225 1880,3225 1880,3025 2020,3025 2020,2700 2075,2700 2075,3025
GND on Top Layer "GND_L01_P013" (solid, pour order 13): 249.4,6.86 cw(c249.4,251.27) 5,251.27 5,3666.27 cw(c255,3666.27) 255,3916.27 5165,3916.27 5168.36,3915.92 cw(c5168.36,3665.92) 5418.36,3665.92 5416.81,3670 5416.81,255 cw(c5166.81,255) 5166.81,5
3.3V_PDB on Top Layer "3.3V_PDB_L01_P000" (solid, pour order 0): 3034.81,2992 3034.81,2973 3083.81,2973 3083.81,2582 3597.81,2582 3598.81,2581 3601.81,2584 3601.81,3096 3082.81,3096 3083.81,3095 3083.81,2992
3.3V_MCU_1 on Top Layer "3.3V_MCU_1_L01_P012" (solid, pour order 12): 2950,1195 2950,1180 3025,1180 3025,805 3535,805 3535,1300 3025,1300 3025,1195
3.3V on Top Layer "3.3V_L01_P005" (solid, pour order 5): 896.81,1575 896.81,1555 971.81,1555 971.81,1290 1461.81,1290 1461.81,1780 1456.81,1775 971.81,1775 971.81,1575
12V_Main on Top Layer "12V_MAIN_L01_P003" (solid, pour order 3): 305,2710 305,2610 2176.81,2610 2181.81,2605 2181.81,2795 2121.81,2795 2126.81,2790 2126.81,2705 1131.81,2705 1111.81,2725 1111.81,2835 1061.81,2835 1061.81,2720 551.81,2720 541.81,2710
GND on Second Layer "GND_L02_P007" (solid, pour order 7): 249.4,6.86 cw(c249.4,251.27) 5,251.27 5,3666.27 cw(c255,3666.27) 255,3916.27 5165,3916.27 5168.36,3915.92 cw(c5168.36,3665.92) 5418.36,3665.92 5416.81,3670 5416.81,255 cw(c5166.81,255) 5166.81,5
GND on Third Layer "GND_L03_P009" (solid, pour order 9): 249.4,6.86 cw(c249.4,251.27) 5,251.27 5,3666.27 cw(c255,3666.27) 255,3916.27 5165,3916.27 5168.36,3915.92 cw(c5168.36,3665.92) 5418.36,3665.92 5416.81,3670 5416.81,255 cw(c5166.81,255) 5166.81,5
GND on Fouth Layer "GND_L04_P010" (solid, pour order 10): 249.4,6.86 cw(c249.4,251.27) 5,251.27 5,3666.27 cw(c255,3666.27) 255,3916.27 5165,3916.27 5168.36,3915.92 cw(c5168.36,3665.92) 5418.36,3665.92 5416.81,3670 5416.81,255 cw(c5166.81,255) 5166.81,5

## Other copper
Top Layer:
  pour cut-out: 3495,1265 3495,840 3490,835 3065,835 3065,1265 3490,1265
  pour cut-out: 1011.81,1745 1011.81,1335 1426.81,1335 1426.81,1745
  pour cut-out: 3116.81,3070 3121.81,3065 3121.81,2620 3571.81,2620 3571.81,3070

## Silkscreen, mask and mechanical layers (free items; w line width, h text height)
Top Overlay:
  text "GND" at 522,3852 h30
  text "GND" at 632,3852 h30
  text "GND" at 752,3852 h30
  text "GND" at 867,3852 h30
  text "GND" at 987,3852 h30
  text "GND" at 1107,3852 h30
  text "GND" at 1232,3852 h30
  text "GND" at 1347,3852 h30
  text "GND" at 1452,3852 h30
  text "GND" at 1577,3852 h30
  text "GND" at 1697,3852 h30
  text "GND" at 1812,3852 h30
  text "GND" at 2127,3837 h30
  text "GND" at 2242,3837 h30
  text "GND" at 2347,3837 h30
  text "GND" at 2472,3837 h30
  text "GND" at 2592,3837 h30
  text "GND" at 2707,3837 h30
  text "3.3V" at 2937,3557 h30
  text "5V" at 1242,3427 h30
  text "3.3V" at 2102,3412 h30
  text "3.3V" at 2227.5,3412.24 h30
  text "3.3V" at 2352.5,3412.24 h30
  text "3.3V" at 2472.5,3412.24 h30
  text "5V" at 1837,3372 h30
  text "5V" at 1122,3367 h30
  text "5V" at 1602,3367 h30
  text "5V" at 1722,3367 h30
  text "5V" at 887,3362 h30
  text "5V" at 1007,3362 h30
  text "5V" at 1362,3362 h30
  text "5V" at 1482,3362 h30
  text "5V" at 532,3357 h30
  text "5V" at 647,3357 h30
  text "5V" at 767,3357 h30
  text "3.3V" at 2477,3357 h30
  text "MOS11" at 4898,3072 h30 r90
  text "MOS10" at 4953,3062 h30 r90
  text "MOS9" at 4903,2927 h30 r90
  text "MOS8" at 4953,2927 h30 r90
  text "MOS7" at 4913,2797 h30 r90
  text "MOS6" at 4958,2797 h30 r90
  text "MOS5" at 4903,2657 h30 r90
  text "MOS4" at 4963,2657 h30 r90
  text "12V" at 407.5,2642.24 h30
  text "SCL_0" at 1013,2532 h30 r90
  text "SDA_0" at 1193,2532 h30 r90
  text "SWCLK_0" at 1273,2532 h30 r90
  text "GND" at 407.5,2527.24 h30
  text "SWDIO_0" at 1363,2527 h30 r90
  text "MOS3" at 4908,2527 h30 r90
  text "MOS2" at 4963,2527 h30 r90
  text "Servo1" at 3087,2467 h30
  text "SCL_2" at 3585.92,2461.9 h30
  text "Therm1" at 3337,2457 h30
  text "Servo0" at 2927,2412 h30
  text "Servo2" at 3207,2412 h30
  text "SDA_2" at 3472,2407 h30
  text "MOS1" at 4908,2387 h30 r90
  text "MOS0" at 4968,2387 h30 r90
  text "Backup_SCL_0" at 672,2137 h30
  text "B_SDA_0" at 1052,2137 h30
  text "LIMIT_B5" at 2207,2089.94 h30
  text "PWM3" at 1672,2087 h30
  text "SWDIO_2" at 3200.92,2071.9 h30
  text "USART_TX_2" at 3440.92,2071.9 h30
  text "Therm2" at 2972,2067 h30
  text "SWCLK_2" at 3057,2017 h30
  text "Therm0" at 3320.92,2011.9 h30
  text "USART_RX_2" at 3565.92,2011.9 h30
  text "PWM2" at 1672,1977 h30
  text "LIMIT_A5" at 2207,1971.83 h30
  text "SWCLK_1" at 3622,1963 h30 r270
  text "SWDIO_1" at 3687,1958 h30 r270
  text "USART1_RX0" at 1308,1887 h30 r90
  text "USART1_TX0" at 1423,1887 h30 r90
  text "PWM1" at 1682,1857 h30
  text "LIMIT_B4" at 2212,1853.72 h30
  text "SDA_1" at 2748,1837 h30 r90
  text "SCL_1" at 2698,1832 h30 r90
  text "PWM0" at 1687,1742 h30
  text "LIMIT_A4" at 2217,1735.61 h30
  text "LIMIT_B11" at 4292,1639.94 h30
  text "PWM9" at 3702,1629.95 h30
  text "NDIR3" at 1662,1622 h30
  text "LIMIT_B3" at 2217,1617.5 h30
  text "BACKUP_SCL" at 2992,1592 h30
  text "BACKUP_SDA" at 2883,1577 h30 r90
  text "LIMIT_A11" at 4292,1521.83 h30
  text "PWM8" at 3702,1511.84 h30
  text "DIR3" at 1677,1507 h30
  text "LIMIT_A3" at 2212,1499.39 h30
  text "LIMIT_B10" at 4297,1403.72 h30
  text "USART_RX" at 3338,1397 h30 r90
  text "USART_TX" at 3453,1397 h30 r90
  text "PWM7" at 3702,1393.73 h30
  text "NDIR2" at 1657,1387 h30
  text "LIMIT_B2" at 2212,1381.27 h30
  text "LIMIT_A10" at 4302,1285.61 h30
  text "PWM6" at 3702,1275.62 h30
  text "DIR2" at 1677,1267 h30
  text "LIMIT_A2" at 2212,1263.16 h30
  text "LIMIT_B9" at 4302,1167.5 h30
  text "NDIR1" at 1677,1167 h30
  text "NDIR9" at 3689.5,1157.51 h30
  text "L_B1" at 2207,1145.05 h30
  text "QUAD_A1" at 747,1052 h30
  text "PWM4" at 1168,1052 h30 r90
  text "LIMIT_A9" at 4297,1049.39 h30
  text "Q_B1" at 1058,1047 h30 r90
  text "DIR1" at 1697,1047 h30
  text "NDIR5" at 1360.95,1041.35 h30
  text "DIR9" at 3704.5,1039.4 h30
  text "DIR5" at 1523.77,1037.97 h30
  text "PWM5" at 1273,1037 h30 r90
  text "L_A1" at 2207,1026.94 h30
  text "LIMIT_B8" at 4297,931.27 h30
  text "NDIR8" at 3689.5,921.28 h30
  text "NDIR0" at 1647,917 h30
  text "L_B0" at 2202,908.83 h30
  text "LIMIT_A8" at 4297,813.16 h30
  text "DIR8" at 3704.5,803.17 h30
  text "DIR0" at 1687,792 h30
  text "LIMIT_A0" at 2202,790.72 h30
  text "QUAD_B5" at 3012,753 h30 r270
  text "QUAD_A5" at 2902,748 h30 r270
  text "PWM10" at 3137,698 h30 r270
  text "DIR10" at 3287,698 h30 r270
  text "LIMIT_B7" at 4292,695.05 h30
  text "PWM11" at 3212,693 h30 r270
  text "NDIR7" at 3689.5,685.06 h30
  text "NDIR11" at 3587,678 h30 r270
  text "Q_A0" at 1413,637 h30 r90
  text "Q_B0" at 1533,637 h30 r90
  text "DIR4" at 928,632 h30 r90
  text "Q_B2" at 1293,627 h30 r90
  text "Q_A2" at 1173,622 h30 r90
  text "NDIR_4" at 1053,587 h30 r90
  text "LIMIT_A7" at 4292,576.94 h30
  text "DIR7" at 3704.5,566.95 h30
  text "LIMIT_B6" at 4287,458.83 h30
  text "NDIR6" at 3689.5,448.84 h30
  text "LIMIT_A6" at 4287,340.72 h30
  text "DIR6" at 3704.5,330.73 h30
  text "QUAD_B6" at 3017,238 h30 r270
  text "QUAD_A6" at 2902,228 h30 r270
  text "QUAD_A4" at 3372,228 h30 r270
  text "QUAD_B4" at 3497,223 h30 r270
  text "NDIR10" at 3257,188 h30 r270
  text "DIR11" at 3142,153 h30 r270
  text "MCU Board - Mihir Kozarekar" at 1322,22 h30
Mechanical 1:
  lines w10: 5,270 5,3655 cw(c252.5,3667.5) 240,3915 5185,3915 cw(c5177.5,3677.5) 5415,3670 ; 5,275 ccw(c245,245) 215,5 5180,5 ccw(c5172.5,247.5) 5415,255 5415,3675